# EAGLE board SPv2.1-twin (EAGLE 6.5.0)
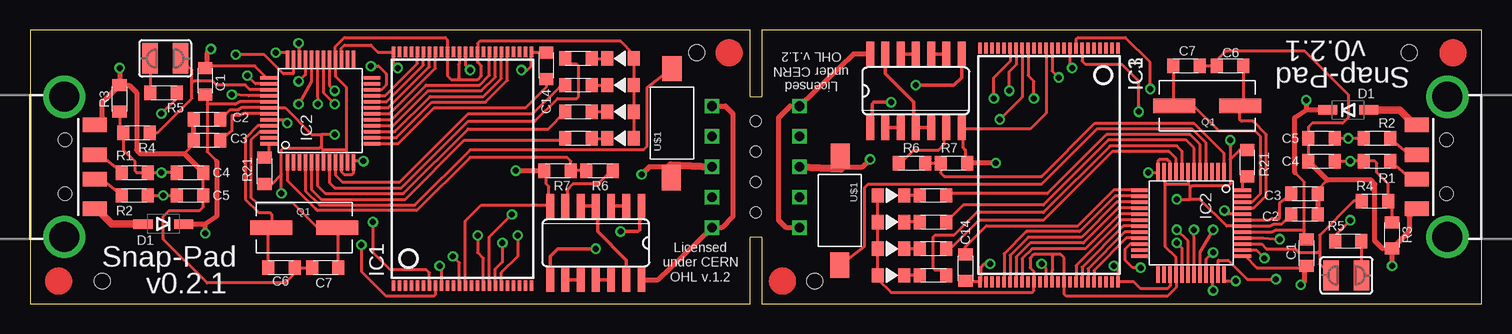
[diagram p0: board, top side]
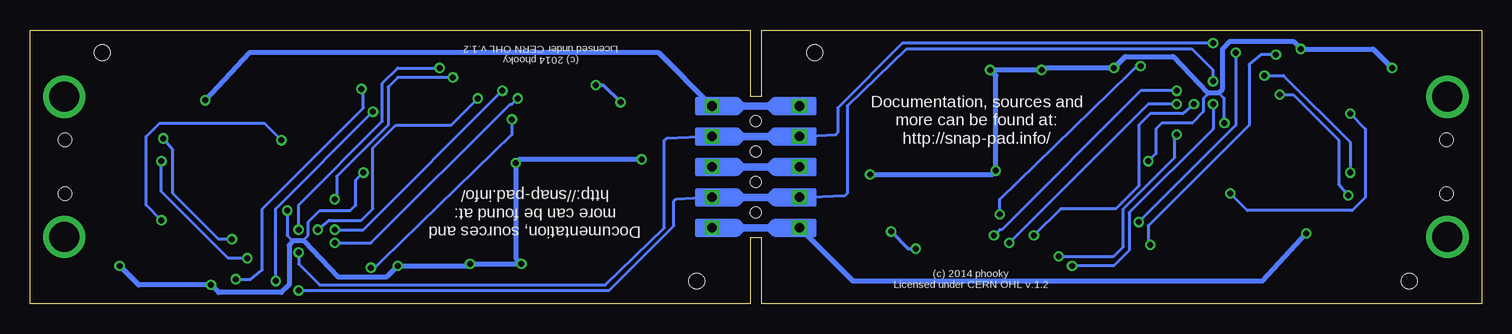
[diagram p1: board, bottom side, seen from below]

Size 120.97 x 22.86 mm. Coordinates in mm from the lower left corner, seen from the top.
Outline: 5.56,0 60.01,0 60.01,5.56 60.96,5.56 60.96,0 115.41,0 120.97,0 120.97,5.4 120.97,17.46 120.97,22.86 115.41,22.86 60.96,22.86 60.96,17.3 60.01,17.3 60.01,22.86 5.56,22.86 0,22.86 0,17.46 0,5.4 0,0 5.56,0
Copper layers (1*16): Top 0.0356mm / dielectric 1.5011mm / Bottom 0.0356mm
Design rules "LaenPCBOrder": minimum track width 6mil, minimum drill 13mil, track to track 6mil, track to pad 6mil, pad to pad 6mil, via to via 6mil, smd to smd 6mil, copper to edge 15mil, drill to drill 6mil, minimum pad ring 7mil, minimum via ring 7mil, stop-mask expansion 3mil, vias tented up to drill 0mil, thermal gap 10mil
Holes 1.3 mm at 6.03,1.91 55.56,20.95 114.94,20.95 65.41,1.91
Holes 0.9 mm at 60.48,15.24 60.48,12.7 60.48,10.16 60.48,7.62

## Footprints (pad centres in the part's own frame; a part is rotated, then mirrored left to right if it is on the bottom)
R0805 = smd 1 x 1.2: P$1 1.1,0; P$2 -1.1,0
SOD123 = smd 1.6 x 0.8: ANODE 1.7,0; CATHODE -1.7,0
TSOP48 = smd 0.9 x 0.3: 1 -9.75,5.75; 2 -9.75,5.25; 3 -9.75,4.75; 4 -9.75,4.25; 5 -9.75,3.75; 6 -9.75,3.25; 7 -9.75,2.75; 8 -9.75,2.25; 9 -9.75,1.75; 10 -9.75,1.25; 11 -9.75,0.75; 12 -9.75,0.25; 13 -9.75,-0.25; 14 -9.75,-0.75; 15 -9.75,-1.25; 16 -9.75,-1.75; 17 -9.75,-2.25; 18 -9.75,-2.75; 19 -9.75,-3.25; 20 -9.75,-3.75; 21 -9.75,-4.25; 22 -9.75,-4.75; 23 -9.75,-5.25; 24 -9.75,-5.75; 25 9.75,-5.75; 26 9.75,-5.25; 27 9.75,-4.75; 28 9.75,-4.25; 29 9.75,-3.75; 30 9.75,-3.25; 31 9.75,-2.75; 32 9.75,-2.25; 33 9.75,-1.75; 34 9.75,-1.25; 35 9.75,-0.75; 36 9.75,-0.25; 37 9.75,0.25; 38 9.75,0.75; 39 9.75,1.25; 40 9.75,1.75; 41 9.75,2.25; 42 9.75,2.75; 43 9.75,3.25; 44 9.75,3.75; 45 9.75,4.25; 46 9.75,4.75; 47 9.75,5.25; 48 9.75,5.75
PT48 = smd 1.4 x 0.3: 1 -4.3,2.75; 2 -4.3,2.25; 3 -4.3,1.75; 4 -4.3,1.25; 5 -4.3,0.75; 6 -4.3,0.25; 7 -4.3,-0.25; 8 -4.3,-0.75; 9 -4.3,-1.25; 10 -4.3,-1.75; 11 -4.3,-2.25; 12 -4.3,-2.75; 25 4.3,-2.75; 26 4.3,-2.25; 27 4.3,-1.75; 28 4.3,-1.25; 29 4.3,-0.75; 30 4.3,-0.25; 31 4.3,0.25; 32 4.3,0.75; 33 4.3,1.25; 34 4.3,1.75; 35 4.3,2.25; 36 4.3,2.75 | smd 0.3 x 1.4: 13 -2.75,-4.3; 14 -2.25,-4.3; 15 -1.75,-4.3; 16 -1.25,-4.3; 17 -0.75,-4.3; 18 -0.25,-4.3; 19 0.25,-4.3; 20 0.75,-4.3; 21 1.25,-4.3; 22 1.75,-4.3; 23 2.25,-4.3; 24 2.75,-4.3; 37 2.75,4.3; 38 2.25,4.3; 39 1.75,4.3; 40 1.25,4.3; 41 0.75,4.3; 42 0.25,4.3; 43 -0.25,4.3; 44 -0.75,4.3; 45 -1.25,4.3; 46 -1.75,4.3; 47 -2.25,4.3; 48 -2.75,4.3
SO14 = smd 0.66 x 2.032: 1 -3.81,-3.073; 2 -2.54,-3.073; 3 -1.27,-3.073; 4 0,-3.073; 5 1.27,-3.073; 6 2.54,-3.073; 7 3.81,-3.073; 8 3.81,3.073; 9 2.54,3.073; 10 1.27,3.073; 11 0,3.073; 12 -1.27,3.073; 13 -2.54,3.073; 14 -3.81,3.073
USB-A-SMT-MALE = smd 1.2 x 2: D+1 1.027,-3.67; D-1 -1.027,-3.67; GND1 3.5,-3.67; VBUS1 -3.5,-3.67 | drill 2.5 pad 2.9: P$1 -5.85,-1.1; P$2 5.85,-1.1 | hole 1.1: 2.25,-1.17; -2.25,-1.17
CSM-3X = smd 3.5 x 1.2: P$1 -2.75,0; P$2 2.75,0
SJW = smd 1.27 x 2.54: 1 -1.27,0; 2 1.27,0
FSMSM = smd 2.1 x 1.6: P$1 -4.55,0.05; P$2 4.55,0
SNAP-HALF = drill 0.8 square: P$1 -3.81,5.08; P$2 -3.81,2.54; P$3 -3.81,0; P$4 -3.81,-2.54; P$5 -3.81,-5.08
LED0805 = smd 1 x 1.2: ANODE -1.1,0; CATHODE 1.1,0

## Placement (x,y rotation side)
C1  4.7uF  [R0805]  14.61,18.57 270 top
C2  220nF  [R0805]  14.76,15.4 0 top
C3  220nF  [R0805]  14.76,13.65 0 top
C4  10pF  [R0805]  13.34,10.95 180 top
C5  10pF  [R0805]  13.34,9.05 180 top
C6  20pF  [R0805]  20.95,3.02 0 top
C7  20pF  [R0805]  24.61,3.02 180 top
C8  4.7uF  [R0805]  106.36,4.29 90 top
C9  220nF  [R0805]  106.2,7.46 180 top
C10  220nF  [R0805]  106.2,9.21 180 top
C11  10pF  [R0805]  107.63,11.91 0 top
C12  10pF  [R0805]  107.63,13.81 0 top
C13  20pF  [R0805]  100.01,19.84 180 top
C14  470nF  [R0805]  43.02,19.84 270 top
C15  20pF  [R0805]  96.36,19.84 0 top
C16  470nF  [R0805]  77.95,3.02 90 top
D1  [SOD123]  11.11,6.67 180 top
D2  [SOD123]  109.86,16.19 0 top
IC1  S34ML0XG1  [TSOP48]  36.04,11.27 90 top
IC2  F5508  [PT48]  24.2,16.12 90 top
IC3  S34ML0XG1  [TSOP48]  84.93,11.59 270 top
IC4  74LS14D  [SO14]  47.15,5.08 180 top
IC5  F5508  [PT48]  96.76,6.74 270 top
IC6  74LS14D  [SO14]  73.82,17.78 0 top
JP1  USBA-SMD-MALE  [USB-A-SMT-MALE]  1.75,11.43 90 top
JP2  USBA-SMD-MALE  [USB-A-SMT-MALE]  119.22,11.43 270 top
Q1  12MHz  [CSM-3X]  22.86,6.35 0 top
Q2  12MHz  [CSM-3X]  98.11,16.51 180 top
R1  27 5%  [R0805]  8.73,10.95 0 top
R2  27 5%  [R0805]  8.73,9.05 0 top
R3  1M  [R0805]  7.46,17.14 90 top
R4  1.4K 1%  [R0805]  8.89,14.29 180 top
R5  100 5%  [R0805]  11.11,17.62 180 top
R6  1.4k  [R0805]  47.47,11.11 180 top
R7  1.4k  [R0805]  43.97,11.11 180 top
R8  27 5%  [R0805]  112.24,11.91 180 top
R9  27 5%  [R0805]  112.24,13.81 180 top
R10  1M  [R0805]  113.51,5.71 270 top
R11  1.4K 1%  [R0805]  112.08,8.57 0 top
R12  100 5%  [R0805]  109.86,5.24 0 top
R13  1M  [R0805]  101.44,11.75 270 top
R14  1.4k  [R0805]  73.5,11.75 0 top
R15  1.4k  [R0805]  76.99,11.75 0 top
R21  1M  [R0805]  19.53,11.11 90 top
SJ1  [SJW]  11.27,20.48 180 top
SJ2  [SJW]  109.7,2.38 0 top
U$1  FSMSM  [FSMSM]  53.5,15.08 90 top
U$2  SNAP-HALF  [SNAP-HALF]  60.64,11.43 180 bottom
U$3  FIDUCAL  [FIDUCAL]  2.38,1.91 0 top
U$4  130  [R0805]  45.72,13.81 0 top
U$5  LED  [LED0805]  49.21,13.81 180 top
U$6  LED  [LED0805]  49.21,16.03 180 top
U$7  LED  [LED0805]  49.21,20.48 180 top
U$8  LED  [LED0805]  49.21,18.26 180 top
U$9  130  [R0805]  45.72,16.03 0 top
U$10  130  [R0805]  45.72,20.48 0 top
U$11  130  [R0805]  45.72,18.26 0 top
U$12  FIDUCAL  [FIDUCAL]  58.26,20.95 0 top
U$13  FSMSM  [FSMSM]  67.47,7.78 270 top
U$14  LED  [LED0805]  71.75,9.05 0 top
U$15  LED  [LED0805]  71.75,6.83 0 top
U$16  LED  [LED0805]  71.75,2.38 0 top
U$17  LED  [LED0805]  71.75,4.6 0 top
U$18  130  [R0805]  75.25,9.05 180 top
U$19  130  [R0805]  75.25,6.83 180 top
U$20  130  [R0805]  75.25,2.38 180 top
U$21  130  [R0805]  75.25,4.6 180 top
U$22  SNAP-HALF  [SNAP-HALF]  60.33,11.43 0 bottom
U$23  FIDUCAL  [FIDUCAL]  118.59,20.95 180 top
U$24  FIDUCAL  [FIDUCAL]  62.71,1.91 180 top

## Library data of the parts
C1-C16 D1 D2 JP1 JP2 Q1 Q2 R1-R15 R21 U$1-U$24 = Passives
IC1 IC3 = Flash
IC2 IC5 = TI_MSP430_v16
IC4 IC6 = 74xx-us
SJ1 SJ2 = jumper

## Nets
!CE!_A: IC1.9 IC2.32
!CE!_A1: IC3.9 IC5.32
!RE!_A: IC1.8 IC2.35
!RE!_A1: IC3.8 IC5.35
!RST_A!: IC2.48 R21.P$1
!RST_A!1: IC5.48 R13.P$1
!WE!_A: IC1.18 IC2.30
!WE!_A1: IC3.18 IC5.30
!WP!_A: IC1.19 IC2.29
!WP!_A1: IC3.19 IC5.29
+1V8_A: C3.P$1 IC2.43
+1V8_A1: C10.P$1 IC5.43
+3V3_A: C2.P$1 IC1.12 IC1.34 IC1.37 IC1.39 IC2.7 IC2.11 IC2.28 IC2.42 R5.P$2 R21.P$2 U$5.ANODE U$6.ANODE U$7.ANODE U$8.ANODE
+3V3_A1: C9.P$1 IC3.12 IC3.34 IC3.37 IC3.39 IC5.7 IC5.11 IC5.28 IC5.42 R12.P$2 R13.P$2 U$14.ANODE U$15.ANODE U$16.ANODE U$17.ANODE
ALE_A: IC1.17 IC2.22
ALE_A1: IC3.17 IC5.22
CLE_A: IC1.16 IC2.31
CLE_A1: IC3.16 IC5.31
D+_A: C4.P$1 IC2.38 R1.P$1 R3.P$2 R4.P$1
D+_A1: C11.P$1 IC5.38 R8.P$1 R10.P$2 R11.P$1
D-_A: C5.P$1 IC2.40 R2.P$1
D-_A1: C12.P$1 IC5.40 R9.P$1
DOUT: IC2.1 R6.P$1 R7.P$2
DOUT1: IC5.1 R14.P$1 R15.P$2
GND: C1.P$2 C2.P$2 C3.P$2 C4.P$2 C5.P$2 C6.P$1 C7.P$1 C8.P$2 C9.P$2 C10.P$2 C11.P$2 C12.P$2 C13.P$1 C14.P$2 C15.P$1 C16.P$2 IC1.13 IC1.25 IC1.36 IC1.48 IC2.10 IC2.12 IC2.27 IC2.37 IC2.44 IC3.13 IC3.25 IC3.36 IC3.48 IC4.7 IC5.10 IC5.12 IC5.27 IC5.37 IC5.44 IC6.7 JP1.GND1 JP2.GND1 R3.P$1 R7.P$1 R10.P$1 R15.P$1 U$1.P$1 U$2.P$3 U$13.P$1 U$22.P$3
N$1: JP1.D+1 R1.P$2
N$2: JP1.D-1 R2.P$2
N$3: C14.P$1 IC2.13
N$4: R5.P$1 SJ1.2
N$5: IC4.11 IC4.12
N$6: IC4.9 IC4.10
N$7: IC4.1 IC4.8
N$8: IC4.2 IC4.3
N$9: IC4.4 IC4.5 IC4.13
N$10: IC4.6 R6.P$2
N$11: JP2.D+1 R8.P$2
N$12: JP2.D-1 R9.P$2
N$13: C16.P$1 IC5.13
N$14: U$16.CATHODE U$20.P$1
N$15: U$15.CATHODE U$19.P$1
N$16: U$14.CATHODE U$18.P$1
N$17: U$17.CATHODE U$21.P$1
N$18: IC5.9 U$21.P$2
N$19: IC2.9 U$11.P$2
N$20: IC5.8 U$20.P$2
N$21: IC5.6 U$19.P$2
N$22: U$7.CATHODE U$10.P$1
N$23: U$6.CATHODE U$9.P$1
N$24: U$4.P$1 U$5.CATHODE
N$25: U$8.CATHODE U$11.P$1
N$26: IC2.8 U$10.P$2
N$27: IC2.6 U$9.P$2
N$28: IC2.5 U$4.P$2
N$29: IC5.5 U$18.P$2
N$30: R12.P$1 SJ2.2
N$31: D2.ANODE JP2.VBUS1
N$32: IC6.11 IC6.12
N$33: D1.ANODE JP1.VBUS1
N$34: IC6.9 IC6.10
N$35: IC6.1 IC6.8
N$36: IC6.2 IC6.3
N$37: IC6.4 IC6.5 IC6.13
N$38: IC6.6 R14.P$2
NANDIO_A0: IC1.29 IC2.14
NANDIO_A1: IC1.30 IC2.15
NANDIO_A2: IC1.31 IC2.16
NANDIO_A3: IC1.32 IC2.17
NANDIO_A4: IC1.41 IC2.18
NANDIO_A5: IC1.42 IC2.19
NANDIO_A6: IC1.43 IC2.20
NANDIO_A7: IC1.44 IC2.21
NANDIO_A8: IC3.29 IC5.14
NANDIO_A9: IC3.30 IC5.15
NANDIO_A10: IC3.31 IC5.16
NANDIO_A11: IC3.32 IC5.17
NANDIO_A12: IC3.41 IC5.18
NANDIO_A13: IC3.42 IC5.19
NANDIO_A14: IC3.43 IC5.20
NANDIO_A15: IC3.44 IC5.21
PUR_A: IC2.39 R4.P$2 SJ1.1
PUR_A1: IC5.39 R11.P$2 SJ2.1
R/B_A: IC1.7 IC2.36
R/B_A1: IC3.7 IC5.36
RX_A: IC2.34 IC5.33 U$2.P$4 U$22.P$2
SW_A: IC2.4 U$1.P$2
SW_A1: IC5.4 U$13.P$2
TCK_A: IC2.26
TCK_A1: IC5.26
TDI_A: IC2.24
TDI_A1: IC5.24
TDO_A: IC2.23
TDO_A1: IC5.23
TMS_A: IC2.25
TMS_A1: IC5.25
TST_A: IC2.47
TST_A1: IC5.47
TX_A: IC2.33 IC5.34 U$2.P$2 U$22.P$4
VBUS: C1.P$1 C8.P$1 D1.CATHODE D2.CATHODE IC2.41 IC4.14 IC5.41 IC6.14 U$2.P$1 U$2.P$5 U$22.P$1 U$22.P$5
XT2IN_A: C6.P$2 IC2.45 Q1.P$1
XT2IN_A1: C13.P$2 IC5.45 Q2.P$1
XT2OUT_A: C7.P$2 IC2.46 Q1.P$2
XT2OUT_A1: C15.P$2 IC5.46 Q2.P$2

## Tracks (layer width: path | path; a pad name or v marks a point on that pad's centre or on a via)
!CE!_A  (via drill 0.5)
  Top 0.254: IC2.32 23.45,18.53 v22.38,16.67 | v34.13,3.17 34.29,3.02 IC1.9
  Bottom 0.254: v22.38,16.67 22.38,14.61 29.37,7.62 29.37,4.45 30.64,3.17 v34.13,3.17
!CE!_A1  (via drill 0.5)
  Top 0.254: IC5.32 97.51,4.33 v98.58,6.19 | v86.84,19.68 86.68,19.84 IC3.9
  Bottom 0.254: v98.58,6.19 98.58,8.26 91.6,15.24 91.6,18.41 90.33,19.68 v86.84,19.68
!RE!_A  (via drill 0.5)
  Top 0.254: IC2.35 21.95,19.25 21.91,19.21 21.11,19.21 19.53,20.8 v17.14,20.8 | v27.62,4.92 27.62,2.7 29.69,0.64 33.66,0.64 33.79,0.77 IC1.8
  Bottom 0.254: v17.14,20.8 18.41,20.8 19.37,20 19.37,14.92 27.78,6.51 27.78,5.08 v27.62,4.92
!RE!_A1  (via drill 0.5)
  Top 0.254: IC5.35 99.01,3.6 99.06,3.65 99.85,3.65 101.44,2.06 v103.82,2.06 | v93.34,17.94 93.34,20.16 91.28,22.23 87.31,22.23 87.18,22.09 IC3.8
  Bottom 0.254: v103.82,2.06 102.55,2.06 101.6,2.86 101.6,7.94 93.19,16.35 93.19,17.78 v93.34,17.94
!RST_A!
  Top 0.254: IC2.48 19.9,12.59 R21.P$1
!RST_A!1
  Top 0.254: IC5.48 101.06,10.27 R13.P$1
!WE!_A  (via drill 0.5)
  Top 0.254: IC2.30 24.45,17.61 v25.4,16.67 | v39.37,5.08 39.37,3.49 38.79,2.91 IC1.18
  Bottom 0.254: v25.4,16.67 27.78,16.67 v39.37,5.08
!WE!_A1  (via drill 0.5)
  Top 0.254: IC5.30 96.51,5.25 v95.57,6.19 | v81.6,17.78 81.6,19.37 82.18,19.95 IC3.18
  Bottom 0.254: v95.57,6.19 93.19,6.19 v81.6,17.78
!WP!_A  (via drill 0.5)
  Top 0.254: IC2.29 24.95,18.23 v25.4,17.78 | v40.64,5.71 40.64,3.97 39.29,2.62 IC1.19
  Bottom 0.254: v25.4,17.78 28.42,17.78 40.01,6.19 40.16,6.19 v40.64,5.71
!WP!_A1  (via drill 0.5)
  Top 0.254: IC5.29 96.01,4.63 v95.57,5.08 | v80.33,17.14 80.33,18.89 81.68,20.25 IC3.19
  Bottom 0.254: v95.57,5.08 92.55,5.08 80.96,16.67 80.8,16.67 v80.33,17.14
+1V8_A
  Top 0.254: IC2.43 17.77,15.87 17.46,15.72 16.83,15.72 16.83,14.45 16.19,13.98 C3.P$1
+1V8_A1
  Top 0.254: IC5.43 103.19,6.99 103.5,7.14 104.14,7.14 104.14,8.41 104.78,8.88 C10.P$1
+3V3_A  (via drill 0.5)
  Top 0.254: IC2.11 26.45,12.6 26.35,12.86 | 26.35,12.86 24.45,12.86 | IC2.7 24.45,12.55 24.45,12.86 | U$5.ANODE U$6.ANODE U$8.ANODE U$7.ANODE 50.31,20.81 49.21,21.91 37.47,21.91 37.31,21.75 37.31,21.04 IC1.34 37.31,21 37.31,20.16 37.62,19.84 37.62,19.05 37.31,18.73 35.88,18.73 | IC1.37 35.79,20.07 35.72,20 35.72,18.89 35.88,18.73 | 35.88,18.73 35.08,18.73 34.79,19.03 IC1.39 34.77,21.04 34.77,22.07 34.61,22.23 26.19,22.23 25.45,21.48 IC2.28 25.45,19 26.35,18.1 26.35,12.86 | C2.P$1 16.66,16.19 17.3,16.19 17.64,16.37 IC2.42 21.25,16.37 23.5,14.13 24.29,14.13 | 24.45,12.86 24.29,13.02 24.29,13.18 | 24.29,14.13 24.29,13.18 | IC1.12 35.79,3.42 v35.24,3.97 | v25.4,14.13 24.29,14.13 | R21.P$2 20.17,10.01 20.95,10.79 | 20.95,10.79 20.95,12.86 21.11,13.02 24.13,13.02 24.29,13.18 | R5.P$2 12.21,17.13 v10.95,15.88 | v20.95,9.21 20.95,10.79
  Bottom 0.254: v35.24,3.97 30.64,3.97 29.84,4.76 29.84,7.94 25.56,12.22 25.56,13.97 v25.4,14.13 | v10.95,15.88 9.68,14.61 9.68,8.89 10.79,7.78 19.53,7.78 v20.95,9.21
+3V3_A1  (via drill 0.5)
  Top 0.254: IC5.11 94.51,10.26 94.61,10 | 94.61,10 96.52,10 | IC5.7 96.51,10.31 96.52,10 | U$14.ANODE U$15.ANODE U$17.ANODE U$16.ANODE 70.66,2.05 71.75,0.95 83.5,0.95 83.66,1.11 83.66,1.82 IC3.34 83.66,1.86 83.66,2.7 83.34,3.02 83.34,3.81 83.66,4.13 85.09,4.13 | IC3.37 85.18,2.79 85.25,2.86 85.25,3.97 85.09,4.13 | 85.09,4.13 85.88,4.13 86.18,3.83 IC3.39 86.2,1.82 86.2,0.79 86.36,0.64 94.77,0.64 95.51,1.38 IC5.28 95.51,3.86 94.61,4.76 94.61,10 | C9.P$1 104.31,6.67 103.66,6.67 103.33,6.49 IC5.42 99.71,6.49 97.47,8.73 96.68,8.73 | 96.52,10 96.68,9.84 96.68,9.68 | 96.68,8.73 96.68,9.68 | IC3.12 85.18,19.43 v85.72,18.89 | v95.57,8.73 96.68,8.73 | R13.P$2 100.8,12.85 100.01,12.06 | 100.01,12.06 100.01,10 99.85,9.84 96.84,9.84 96.68,9.68 | R12.P$2 108.75,5.73 v110.01,6.99 | v100.01,13.65 100.01,12.06
  Bottom 0.254: v85.72,18.89 90.33,18.89 91.12,18.1 91.12,14.92 95.41,10.64 95.41,8.89 v95.57,8.73 | v110.01,6.99 111.28,8.26 111.28,13.97 110.17,15.08 101.44,15.08 v100.01,13.65
ALE_A  (via drill 0.5)
  Top 0.254: IC1.17 38.29,5.58 v40.16,7.46 | v28.42,19.84 29.05,19.84 29.69,19.21 29.69,18.26 29.3,17.87 IC2.22
  Bottom 0.254: v40.16,7.46 40.16,8.73 29.37,19.21 28.73,19.84 v28.42,19.84
ALE_A1  (via drill 0.5)
  Top 0.254: IC3.17 82.68,17.28 v80.8,15.4 | v92.55,3.02 91.92,3.02 91.28,3.65 91.28,4.6 91.67,4.99 IC5.22
  Bottom 0.254: v80.8,15.4 80.8,14.13 91.6,3.65 92.23,3.02 v92.55,3.02
CLE_A  (via drill 0.5)
  Top 0.254: IC2.31 23.95,17.76 v23.97,16.67 | IC1.16 37.79,3.81 37.31,4.29 v37.31,5.71
  Bottom 0.254: v23.97,16.67 24.92,15.88 27.62,15.88 28.57,14.92 28.57,9.84 30.48,7.94 35.08,7.94 v37.31,5.71
CLE_A1  (via drill 0.5)
  Top 0.254: IC5.31 97.01,5.1 v97,6.19 | IC3.16 83.18,19.05 83.66,18.57 v83.66,17.14
  Bottom 0.254: v97,6.19 96.04,6.99 93.34,6.99 92.39,7.94 92.39,13.02 90.49,14.92 85.88,14.92 v83.66,17.14
D+_A  (via drill 0.5)
  Top 0.254: C4.P$1 v10.95,10.95 R1.P$1 8.89,10.95 8.73,11.11 8.73,11.91 7.79,12.85 R4.P$1 7.46,14.62 R3.P$2 | IC2.38 18.78,18.37 v18.1,19.05
  Bottom 0.254: 10.95,11.34 v10.95,10.95 10.95,13.49 16.51,19.05 v18.1,19.05
D+_A1  (via drill 0.5)
  Top 0.254: C11.P$1 v110.01,11.91 R8.P$1 112.08,11.91 112.24,11.75 112.24,10.95 113.18,10.01 R11.P$1 113.51,8.24 R10.P$2 | IC5.38 102.19,4.49 v102.87,3.81
  Bottom 0.254: 110.01,11.52 v110.01,11.91 110.01,9.37 104.46,3.81 v102.87,3.81
D-_A  (via drill 0.5)
  Top 0.254: IC2.40 18.19,17.37 v16.83,17.46 | C5.P$1 v11.11,9.05 R2.P$1
  Bottom 0.254: v16.83,17.46 15.72,17.46 11.91,13.65 11.91,10 v11.11,9.05
D-_A1  (via drill 0.5)
  Top 0.254: IC5.40 102.78,5.49 v104.14,5.4 | C12.P$1 v109.86,13.81 R9.P$1
  Bottom 0.254: v104.14,5.4 105.25,5.4 109.06,9.21 109.06,12.86 v109.86,13.81
DOUT
  Top 0.254: IC2.1 21.45,10.3 23.81,7.94 23.97,7.78 32.23,7.78 36.67,12.22 44.77,12.22 45.07,11.92 R7.P$2 R6.P$1
DOUT1
  Top 0.254: IC5.1 99.51,12.56 97.16,14.92 97,15.08 88.74,15.08 84.3,10.64 76.2,10.64 75.89,10.94 R15.P$2 R14.P$1
GND  (via drill 0.5)
  Top 0.254: IC2.10 25.95,11.04 26.19,10.79 26.83,10.79 26.95,10.92 IC2.12 27.04,11.91 v27.78,11.91 | IC1.36 36.29,19.91 v36.67,19.53 | v40.96,19.53 41.43,19.53 41.75,19.84 41.75,20.99 IC1.25 42.94,21.02 C14.P$2 | IC1.13 36.29,6.92 37.62,8.26 43.24,8.26 | 43.24,8.26 IC4.7 | IC2.27 25.95,21.35 26.19,21.59 28.42,21.59 28.98,21.02 IC1.48 30.29,20.04 v30.64,19.68 | IC2.37 19.71,18.87 18.73,19.84 14.78,19.84 C1.P$2 | C4.P$2 C5.P$2 14.45,9.04 14.45,8.1 14.13,7.78 11.59,7.78 11.11,7.3 11.11,5.4 14.76,1.75 21.27,1.75 22.05,2.53 C6.P$1 C7.P$1 | 43.24,8.26 43.24,9.79 43.02,10 43.02,10.96 R7.P$1 | C3.P$2 13.66,13.36 12.85,12.54 | IC2.44 21.14,15.37 v21.43,15.08 | IC5.10 95.01,11.82 94.77,12.06 94.14,12.06 94.01,11.94 IC5.12 93.93,10.95 v93.19,10.95 | IC3.36 84.68,2.95 v84.3,3.33 | v80.01,3.33 79.53,3.33 79.22,3.02 79.22,1.87 IC3.25 78.02,1.84 C16.P$2 | IC3.13 84.68,15.94 83.34,14.61 77.73,14.61 | 77.73,14.61 IC6.7 | IC5.27 95.01,1.51 94.77,1.27 92.55,1.27 91.98,1.84 IC3.48 90.68,2.82 v90.33,3.17 | IC5.37 101.26,3.99 102.23,3.02 106.19,3.02 C8.P$2 | C11.P$2 C12.P$2 106.52,13.82 106.52,14.76 106.84,15.08 109.38,15.08 109.86,15.56 109.86,17.46 106.2,21.11 99.69,21.11 98.91,20.33 C13.P$1 C15.P$1 | 77.73,14.61 77.73,13.07 77.95,12.86 77.95,11.89 R15.P$1 | C10.P$2 107.3,9.5 108.12,10.32 | IC5.44 99.82,7.49 v99.54,7.78
  Top 0.406: JP1.GND1 5.41,14.93 6.03,15.56 6.03,16.82 R3.P$1 | R3.P$1 8.27,18.25 8.89,17.62 8.89,12.86 9.21,12.54 12.85,12.54 C4.P$2 14.62,11.13 | C3.P$2 C2.P$2 | 53.24,11.43 51.59,11.43 v50.96,10.79 | v40.48,11.11 R7.P$1 | v7.46,19.68 R3.P$1 | 14.78,19.84 14.78,20.97 v15.08,21.27 | JP2.GND1 115.56,7.93 114.94,7.3 114.94,6.04 R10.P$1 | R10.P$1 112.7,4.62 112.08,5.24 112.08,10 111.76,10.32 108.12,10.32 C11.P$2 106.35,11.72 | C10.P$2 C9.P$2 | 67.73,11.43 69.37,11.43 v70.01,12.06 | v80.49,11.75 R15.P$1 | v113.51,3.17 R10.P$1 | 106.19,3.02 106.19,1.89 v105.89,1.59
  Top 0.61: 53.24,11.43 U$1.P$1 53.4,11.59 U$2.P$3 | 67.73,11.43 U$13.P$1 67.57,11.27 U$22.P$3
  Bottom 0.254: 36.51,19.68 v36.67,19.53 | 22.86,17.62 22.86,17.46 23.18,17.14 23.18,16.03 24.13,15.08 26.67,15.08 27.15,14.61 27.15,12.54 v27.78,11.91 | v21.43,15.08 21.43,17.14 21.91,17.62 | 84.45,3.17 v84.3,3.33 | 98.11,5.24 98.11,5.4 97.79,5.71 97.79,6.83 96.84,7.78 94.3,7.78 93.82,8.26 93.82,10.32 v93.19,10.95 | v99.54,7.78 99.54,5.71 99.06,5.24
  Bottom 0.406: v36.67,19.53 v40.96,19.53 40.48,19.05 v40.48,11.11 40.8,10.79 v50.96,10.79 | 36.51,19.68 v30.64,19.68 29.69,20.64 25.72,20.64 22.86,17.62 21.91,17.62 21.59,17.94 21.59,21.27 20.95,21.91 15.72,21.91 v15.08,21.27 9.05,21.27 v7.46,19.68 | v84.3,3.33 v80.01,3.33 80.49,3.81 v80.49,11.75 80.17,12.06 v70.01,12.06 | 84.45,3.17 v90.33,3.17 91.28,2.22 95.25,2.22 98.11,5.24 99.06,5.24 99.38,4.92 99.38,1.59 100.01,0.95 105.25,0.95 v105.89,1.59 111.92,1.59 v113.51,3.17
  Bottom 0.61: U$2.P$3 U$22.P$3
N$1
  Top 0.254: JP1.D+1 5.84,12.43 R1.P$2
N$2
  Top 0.254: JP1.D-1 5.93,10.43 R2.P$2
N$3
  Top 0.254: C14.P$1 43.02,18.1 41.27,16.35 33.66,16.35 30.67,13.37 IC2.13
N$4
  Top 0.254: SJ1.2 10,17.63 R5.P$1
N$5
  Top 0.305: IC4.11 IC4.12
N$6
  Top 0.305: IC4.9 IC4.10
N$7  (via drill 0.5)
  Top 0.305: IC4.8 43.34,3.97 43.97,4.6 v47.15,4.6 | v49.21,6.03 50.64,6.03 50.8,6.19 50.8,8 IC4.1
  Bottom 0.305: v47.15,4.6 47.78,4.6 v49.21,6.03
N$8
  Top 0.305: IC4.3 IC4.2
N$9
  Top 0.305: IC4.5 IC4.4 47.31,8 47.31,6.03 49.69,3.65 IC4.13
N$10
  Top 0.254: R6.P$2 48.42,11.11 47.31,10 45.24,10 44.77,9.53 44.77,8.31 IC4.6
N$11
  Top 0.254: JP2.D+1 115.13,10.43 R8.P$2
N$12
  Top 0.254: JP2.D-1 115.03,12.43 R9.P$2
N$13
  Top 0.254: C16.P$1 77.95,4.76 79.69,6.51 87.31,6.51 90.3,9.49 IC5.13
N$14
  Top 0.254: U$20.P$1 U$16.CATHODE
N$15
  Top 0.254: U$19.P$1 U$15.CATHODE
N$16
  Top 0.254: U$18.P$1 U$14.CATHODE
N$17
  Top 0.254: U$21.P$1 U$17.CATHODE
N$18
  Top 0.254: IC5.9 95.51,12.12 94.93,12.7 90.17,12.7 84.45,6.99 79.06,6.99 76.83,4.76 76.51,4.76 U$21.P$2
N$19
  Top 0.254: IC2.9 25.45,10.74 26.04,10.16 30.8,10.16 36.51,15.88 41.91,15.88 44.13,18.1 44.46,18.1 U$11.P$2
N$20
  Top 0.254: IC5.8 96.01,12.73 95.57,13.18 90.01,13.18 84.45,7.62 78.9,7.62 76.99,5.71 75.41,5.71 75.25,5.56 75.25,3.02 75.41,2.86 75.87,2.86 U$20.P$2
N$21
  Top 0.254: IC5.6 97.01,13 96.36,13.65 89.85,13.65 84.45,8.26 77.78,8.26 U$19.P$2
N$22
  Top 0.254: U$10.P$1 U$7.CATHODE
N$23
  Top 0.254: U$9.P$1 U$6.CATHODE
N$24
  Top 0.254: U$4.P$1 U$5.CATHODE
N$25
  Top 0.254: U$11.P$1 U$8.CATHODE
N$26
  Top 0.254: IC2.8 24.95,10.13 25.4,9.68 30.96,9.68 36.51,15.24 42.07,15.24 43.97,17.14 45.56,17.14 45.72,17.3 45.72,19.84 45.56,20 45.1,20 U$10.P$2
N$27
  Top 0.254: IC2.6 23.95,9.86 24.61,9.21 31.11,9.21 36.51,14.61 43.19,14.61 U$9.P$2
N$28
  Top 0.254: IC2.5 23.45,9.57 24.29,8.73 31.27,8.73 36.2,13.65 44.3,13.65 U$4.P$2
N$29
  Top 0.254: IC5.5 97.51,13.29 96.68,14.13 89.69,14.13 84.77,9.21 76.67,9.21 U$18.P$2
N$30
  Top 0.254: SJ2.2 110.97,5.23 R12.P$1
N$31
  Top 0.61: JP2.VBUS1 115.4,14.93 114.14,16.19 D2.ANODE
N$32
  Top 0.305: IC6.11 IC6.12
N$33
  Top 0.61: JP1.VBUS1 5.56,7.93 6.83,6.67 D1.ANODE
N$34
  Top 0.305: IC6.9 IC6.10
N$35  (via drill 0.5)
  Top 0.305: IC6.8 77.63,18.89 76.99,18.26 v73.82,18.26 | v71.75,16.83 70.33,16.83 70.17,16.67 70.17,14.87 IC6.1
  Bottom 0.305: v73.82,18.26 73.18,18.26 v71.75,16.83
N$36
  Top 0.305: IC6.3 IC6.2
N$37
  Top 0.305: IC6.5 IC6.4 73.66,14.87 73.66,16.83 71.28,19.21 IC6.13
N$38
  Top 0.254: R14.P$2 72.55,11.75 73.66,12.86 75.72,12.86 76.2,13.34 76.2,14.55 IC6.6
NANDIO_A0
  Top 0.254: IC2.14 30.54,13.87 33.5,16.83 37.94,16.83 39.79,18.67 IC1.29
NANDIO_A1
  Top 0.254: IC2.15 30.4,14.37 33.34,17.3 37.78,17.3 39.29,18.81 IC1.30
NANDIO_A2
  Top 0.254: IC2.16 30.27,14.87 33.18,17.78 37.62,17.78 38.79,18.94 IC1.31
NANDIO_A3
  Top 0.254: IC2.17 30.13,15.37 33.02,18.26 37.47,18.26 38.29,19.08 IC1.32
NANDIO_A4
  Top 0.254: IC2.18 30,15.87 33.79,19.66 IC1.41
NANDIO_A5
  Top 0.254: IC2.19 29.86,16.37 33.29,19.79 IC1.42
NANDIO_A6
  Top 0.254: IC2.20 29.73,16.87 32.79,19.93 IC1.43
NANDIO_A7
  Top 0.254: IC2.21 29.59,17.37 32.29,20.06 IC1.44
NANDIO_A8
  Top 0.254: IC5.14 90.43,8.99 87.47,6.03 83.03,6.03 81.18,4.19 IC3.29
NANDIO_A9
  Top 0.254: IC5.15 90.56,8.49 87.63,5.56 83.19,5.56 81.68,4.05 IC3.30
NANDIO_A10
  Top 0.254: IC5.16 90.7,7.99 87.79,5.08 83.34,5.08 82.18,3.92 IC3.31
NANDIO_A11
  Top 0.254: IC5.17 90.83,7.49 87.95,4.6 83.5,4.6 82.68,3.78 IC3.32
NANDIO_A12
  Top 0.254: IC5.18 90.97,6.99 87.18,3.2 IC3.41
NANDIO_A13
  Top 0.254: IC5.19 91.11,6.49 87.68,3.07 IC3.42
NANDIO_A14
  Top 0.254: IC5.20 91.24,5.99 88.18,2.93 IC3.43
NANDIO_A15
  Top 0.254: IC5.21 91.38,5.49 88.68,2.8 IC3.44
PUR_A
  Top 0.254: IC2.39 18.33,17.87 17.94,18.26 15.56,18.26 15.24,18.57 13.65,18.57 13.49,18.41 | 13.49,18.41 13.49,19.53 SJ1.1 | R4.P$2 10.64,14.29 13.49,17.14 13.49,18.41
PUR_A1
  Top 0.254: IC5.39 102.64,4.99 103.03,4.6 105.41,4.6 105.73,4.29 107.31,4.29 107.47,4.45 | 107.47,4.45 107.47,3.33 SJ2.1 | R11.P$2 110.33,8.57 107.47,5.71 107.47,4.45
R/B_A  (via drill 0.5)
  Top 0.254: IC2.36 21.45,20.61 21.43,20.95 v20.48,20.95 | v28.57,6.83 28.57,4.29 30,2.86 33.02,2.86 33.29,2.59 IC1.7
  Bottom 0.254: v20.48,20.95 20.48,14.92 v28.57,6.83
R/B_A1  (via drill 0.5)
  Top 0.254: IC5.36 99.51,2.25 99.54,1.91 v100.49,1.91 | v92.39,16.03 92.39,18.57 90.96,20 87.95,20 87.68,20.27 IC3.7
  Bottom 0.254: v100.49,1.91 100.49,7.94 v92.39,16.03
RX_A  (via drill 0.5)
  Top 0.254: IC2.34 22.45,21.36 v22.38,21.75 | IC5.33 98.01,3.75 v98.58,4.29
  Bottom 0.254: v22.38,21.75 48.26,21.75 53.66,16.35 53.66,14.29 53.82,14.13 U$2.P$4 | v98.58,4.29 98.58,3.33 96.84,1.59 73.03,1.59 68.1,6.35 68.1,13.65 67.94,13.81 U$22.P$2
  Bottom 0.61: U$22.P$2 U$2.P$4
SW_A
  Top 0.254: IC2.4 22.95,9.43 24.13,8.26 32.07,8.26 36.67,12.86 51.12,12.86 51.44,13.18 51.44,18.04 U$1.P$2
SW_A1
  Top 0.254: IC5.4 98.01,13.43 96.84,14.61 88.9,14.61 84.3,10 69.85,10 69.53,9.68 69.53,4.82 U$13.P$2
TX_A  (via drill 0.5)
  Top 0.254: IC2.33 22.95,19.11 v22.38,18.57 | IC5.34 98.51,1.5 v98.58,1.11
  Bottom 0.254: v22.38,18.57 22.38,19.53 24.13,21.27 47.94,21.27 52.86,16.51 52.86,9.21 53.02,9.05 U$2.P$2 | v98.58,1.11 72.71,1.11 67.31,6.51 67.31,8.57 67.15,8.73 U$22.P$4
  Bottom 0.61: U$22.P$4 U$2.P$2
VBUS  (via drill 0.5)
  Top 0.254: IC2.41 17.5,16.87 17.14,16.67 14.76,16.67 | 14.76,16.67 14.76,12.7 15.56,11.91 | C1.P$1 14.75,17.47 14.76,17.46 14.76,16.67 | IC5.41 103.46,5.99 103.82,6.19 106.2,6.19 | 106.2,6.19 106.2,10.16 105.41,10.95 | C8.P$1 106.22,5.39 106.2,5.4 106.2,6.19
  Top 0.406: D1.CATHODE 14.61,6.67 | 15.56,11.91 15.56,7.3 14.61,6.67 | U$2.P$5 57.94,16.51 58.58,15.88 58.58,7.3 57.63,6.35 U$2.P$1 52.33,2.01 IC4.14 | v14.61,5.87 14.61,6.67 | D2.CATHODE 106.36,16.19 | 105.41,10.95 105.41,15.56 106.36,16.19 | U$22.P$5 63.02,6.35 62.39,6.99 62.39,15.56 63.34,16.51 U$22.P$1 68.64,20.85 IC6.14 | v106.36,16.99 106.36,16.19
  Bottom 0.406: U$2.P$1 52.39,1.91 18.26,1.91 v14.61,5.87 | U$22.P$1 68.58,20.95 102.71,20.95 v106.36,16.99
  Bottom 0.61: U$2.P$5 U$22.P$1 | U$2.P$1 U$22.P$5
XT2IN_A
  Top 0.254: IC2.45 19,14.87 17.94,13.81 17.94,8.73 19.05,7.62 20,7.62 20.16,7.46 20.16,6.4 Q1.P$1 19.86,6.09 C6.P$2
XT2IN_A1
  Top 0.254: IC5.45 101.97,7.99 103.03,9.05 103.03,14.13 101.92,15.24 100.97,15.24 100.81,15.4 100.81,16.46 Q2.P$1 101.11,16.77 C13.P$2
XT2OUT_A
  Top 0.254: IC2.46 19.13,14.37 18.41,13.65 18.41,8.89 18.89,8.41 21.91,8.41 23.97,6.35 Q1.P$2 25.71,6.25 C7.P$2
XT2OUT_A1
  Top 0.254: IC5.46 101.84,8.49 102.55,9.21 102.55,13.97 102.08,14.45 99.06,14.45 97,16.51 Q2.P$2 95.26,16.61 C15.P$2

## Text on the board
tPlace: v0.2.1 | Licensed / under CERN / OHL v.1.2 | Snap-Pad | Snap-Pad | Licensed / under CERN / OHL v.1.2 | v0.2.1
bPlace: (c) 2014 phooky / Licensed under CERN OHL v.1.2 | Documentation, sources and / more can be found at: / http://snap-pad.info/ | Documentation, sources and / more can be found at: / http://snap-pad.info/ | (c) 2014 phooky / Licensed under CERN OHL v.1.2
tNames: IC1 | C7 | C6 | C1 | C14 | R5 | D1 | R3 | C2 | Q1 | R2 | IC2 | R4 | C3 | U$1 | R6 | R7 | R21 | C5 | R1 | C4 | C4 | R1 | R21 | R7 | R6 | U$1 | C5 | IC2 | C3 | R4 | C2 | R2 | Q1 | D1 | R5 | R3 | C14 | C1 | C7 | IC1 | C6